# EAGLE board proto1 (EAGLE 9.6.2)

Size 100 x 80 mm. Coordinates in mm from the lower left corner, seen from the top.
Outline: 0,0 100,0 100,80 0,80 0,0
Copper layers (1*16): Top 0.035mm / dielectric 1.5mm / Bottom 0.035mm
Design rules "default": minimum track width 6mil, minimum drill 0.35mm, track to track 6mil, track to pad 6mil, pad to pad 6mil, via to via 6mil, smd to smd 6mil, copper to edge 40mil, drill to drill 6mil, minimum pad ring 10mil, minimum via ring 8mil, stop-mask expansion 4mil, vias tented up to drill 0mil, thermal gap 10mil

## Footprints (pad centres in the part's own frame; a part is rotated, then mirrored left to right if it is on the bottom)
USB-MINIB-THM = drill 0.7 offset: D+ 0,9.8; D- -0.8,8.5; GND 1.6,9.8; ID 0.8,8.5; VBUS -1.6,9.8 | drill 2 pad 3.81: GND1 -4,3.9; GND4 4,3.9 | drill 2 pad 3.2: GND2 -4,8.6; GND3 4,8.6
LED5MM = drill 0.813 octagon: A -1.27,0; K 1.27,0
0207/10 = drill 0.813 pad 1.676 octagon: 1 -5.08,0; 2 5.08,0
ESP32_DEVKIT = drill 0.9 pad 1.422 octagon: 3V3 11.43,-17.78; D2 11.43,-10.16; D4 11.43,-7.62; D5 11.43,0; D12 -13.97,-10.16; D13 -13.97,-12.7; D14 -13.97,-7.62; D15 11.43,-12.7; D18 11.43,2.54; D19 11.43,5.08; D21 11.43,7.62; D22 11.43,15.24; D23 11.43,17.78; D25 -13.97,0; D26 -13.97,-2.54; D27 -13.97,-5.08; D32 -13.97,5.08; D33 -13.97,2.54; D34 -13.97,10.16; D35 -13.97,7.62; EN -13.97,17.78; GND@1 -13.97,-15.24; GND@2 11.43,-15.24; RX0 11.43,10.16; RX2 11.43,-5.08; TX0 11.43,12.7; TX2 11.43,-2.54; VIN -13.97,-17.78; VN -13.97,12.7; VP -13.97,15.24
GY-9250 = drill 0.799 pad 1.778 long: ADO 1,8.76; ECL 1,11.3; EDA 1,13.84; FSYNC 1,1.14; GND 1,21.46; INT 1,6.22; NCS 1,3.68; SCL 1,18.92; SDA 1,16.38; VCC 1,24

## Placement (x,y rotation side)
CN1  [USB-MINIB-THM]  2,68 270 top
LEDBLU  [LED5MM]  6,24 0 top
LEDGRE  [LED5MM]  6,15 0 top
LEDRED  [LED5MM]  6,6 0 top
R1  [0207/10]  16,6 180 top
R2  [0207/10]  16,24 180 top
R3  [0207/10]  16,15 180 top
U$1  ESP32_DEVKIT  [ESP32_DEVKIT]  29,44 270 top
U$2  GY-9250  [GY-9250]  -16,1 0 top  (outside the outline)

## Library data of the parts
CN1 R1-R3 = adafruit
LEDBLU LEDGRE LEDRED = led
U$1 = DOIT_ESP32_DEVKIT
U$2 = GY-9250

## Nets
GND: CN1.GND U$1.GND@1 U$1.GND@2 U$2.GND
LEDBLU: R2.1 U$1.D35
LEDGRE: R3.1 U$1.D32
LEDRED: R1.1 U$1.D34
N$1: LEDRED.K R1.2
N$3: LEDBLU.K R2.2
N$4: LEDGRE.K R3.2
SCL: U$1.D22 U$2.SCL
SDA: U$1.D21 U$2.SDA
VCC: CN1.VBUS LEDBLU.A LEDGRE.A LEDRED.A U$1.3V3 U$2.VCC

## Tracks (layer width: path | path; a pad name or v marks a point on that pad's centre or on a via)
GND  (3 unrouted)
LEDBLU  (1 unrouted)
LEDGRE  (1 unrouted)
LEDRED  (1 unrouted)
N$1  (1 unrouted)
N$3  (1 unrouted)
N$4  (1 unrouted)
SCL  (1 unrouted)
SDA  (1 unrouted)
VCC  (5 unrouted)